# Altium PCB SMT160.PcbDoc
Units mm, origin at the board's own origin, x right, y up, seen from the top; angles counter-clockwise.
Board outline 261 x 160 mm, 2 copper layers (Top Layer, Bottom Layer); 36 components, 40 nets, 117 pads, 0 vias.
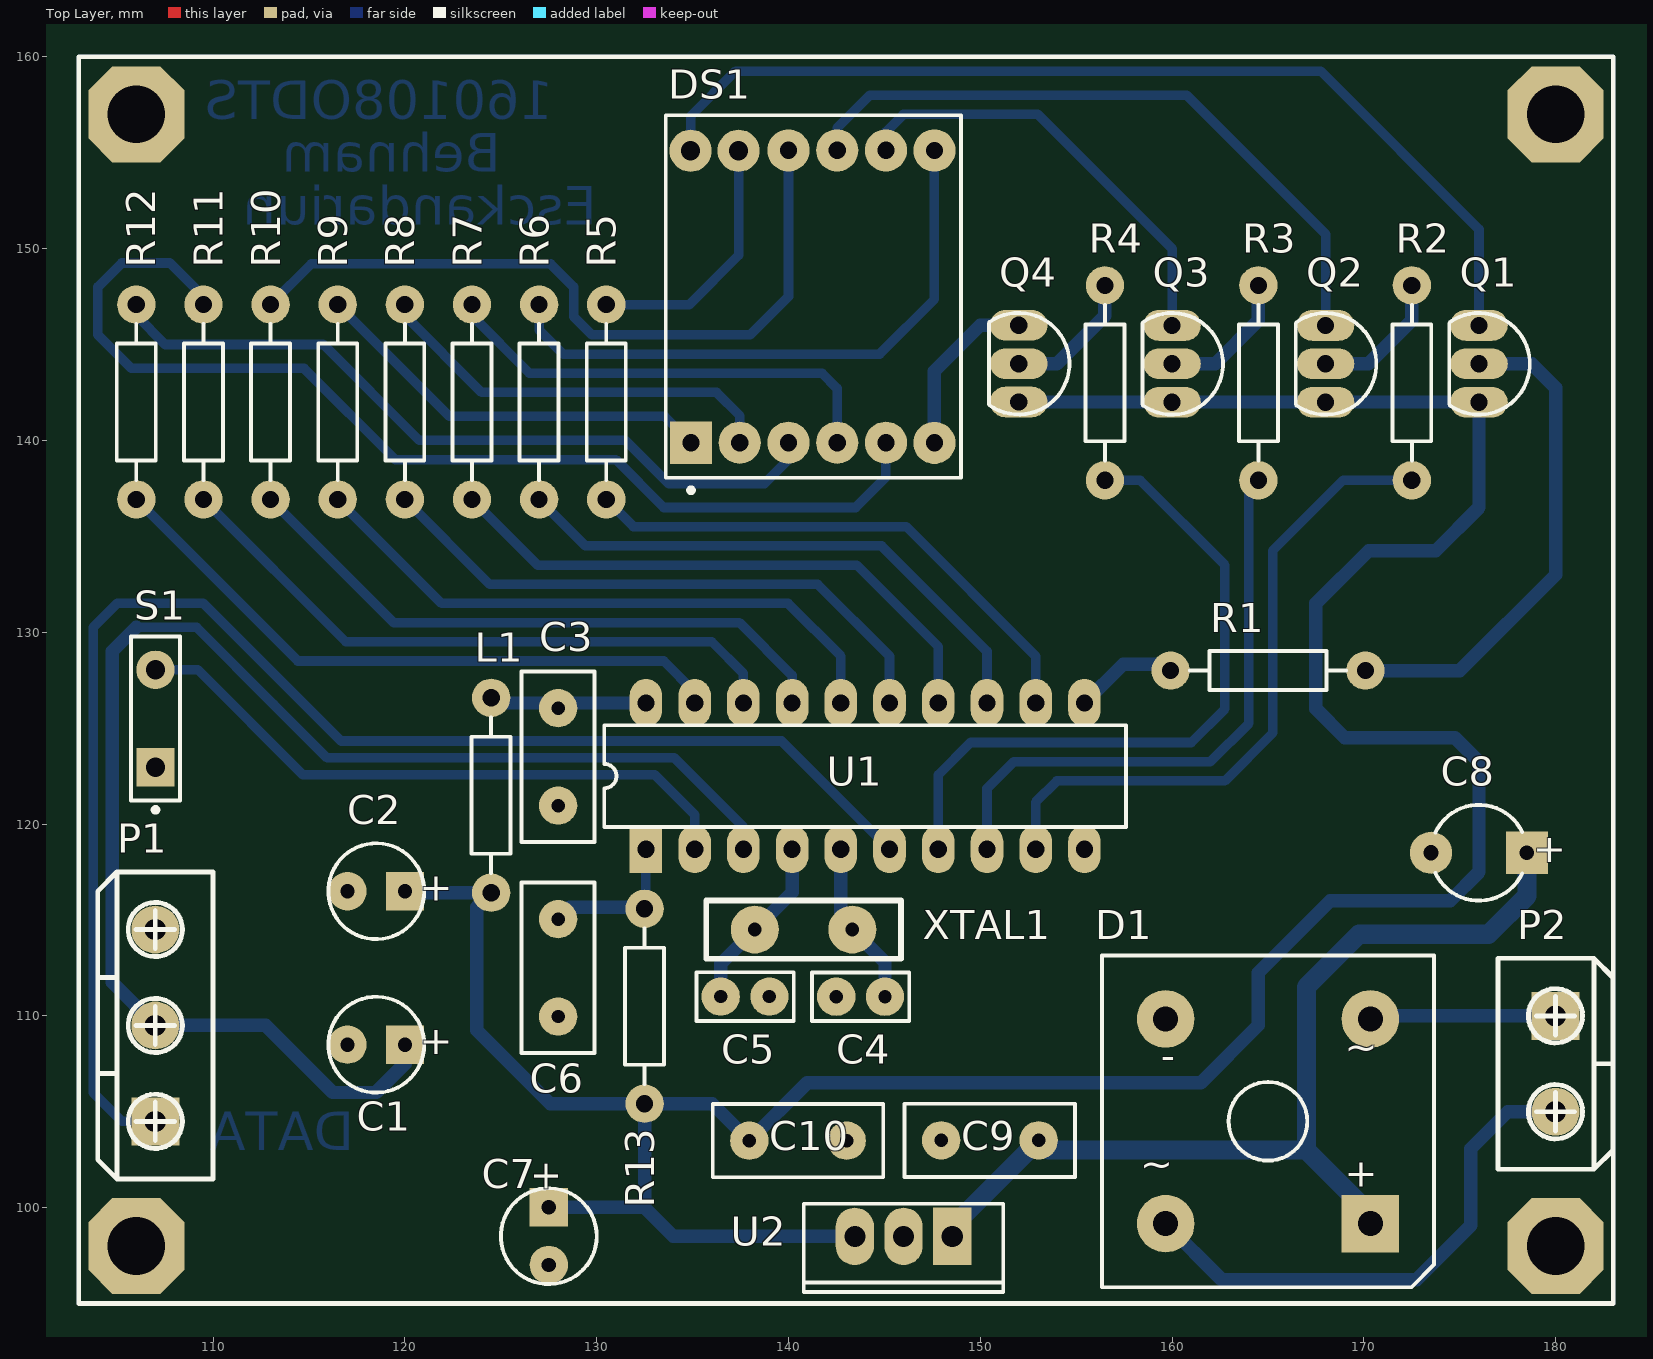
[diagram p0: Top Layer view]
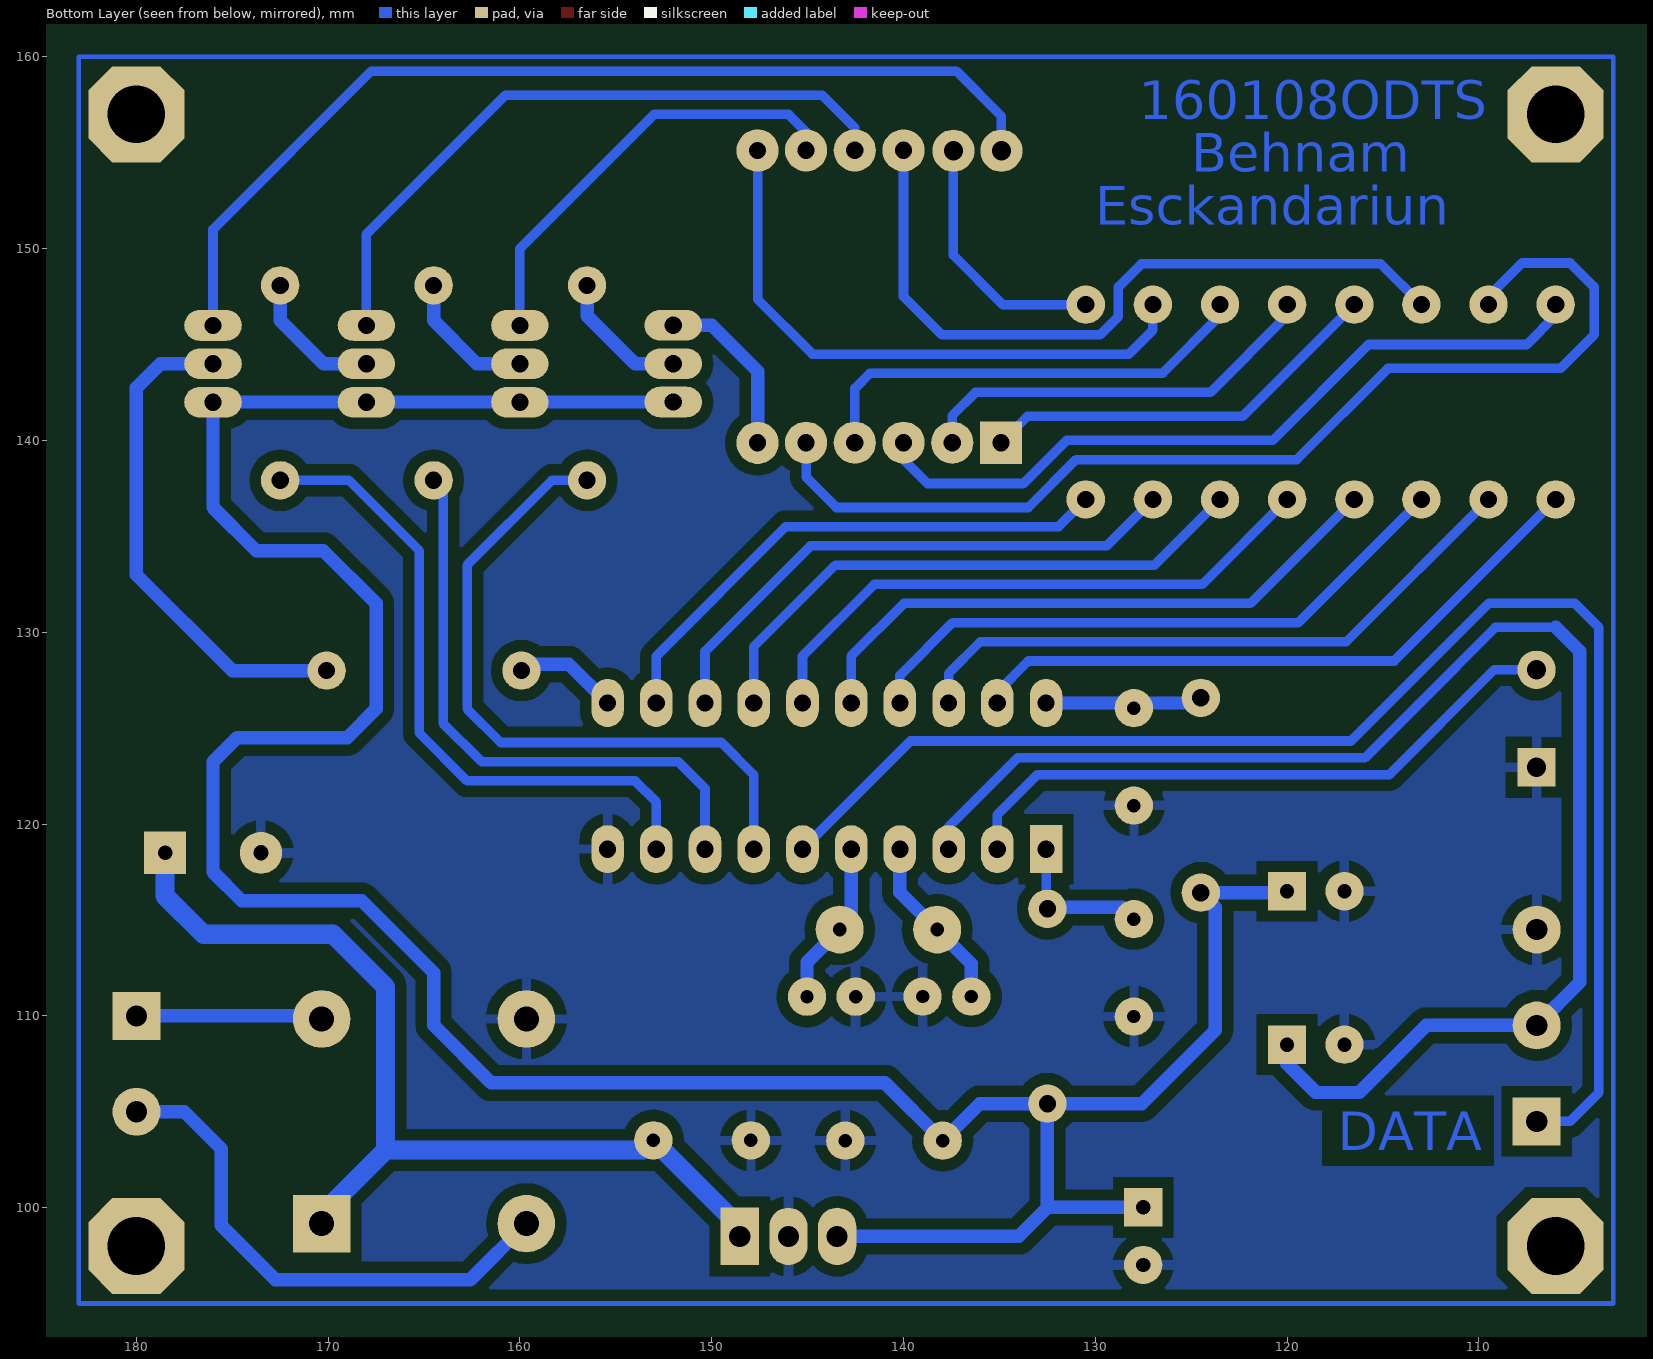
[diagram p1: Bottom Layer view, seen from below]

## Layer stack, top to bottom
Top Layer: signal copper 0.0356
Dielectric: dielectric 0.32, FR-4, Dk 4.8
Bottom Layer: signal copper 0.0356

## Board outline
24,182 285,182 285,22 24,22

## Design rules (kind name [scope] priority, off if disabled: settings)
Clearance [All] p1: gap=0.3
ComponentClearance [All] p1: gap=0.254 collisioncheckmode=3 verticalgap=0.254
HoleSize [All] p1: absolutevalues=TRUE maxlimit=3 minlimit=0.025 maxpercent=80.000 minpercent=20.000
PolygonConnect [All] p1: connectstyle=Relief reliefconductorwidth=0.5 reliefentries=4 polygonreliefangle="90 Angle"
RoutingLayers [All] p1: top layer_v5=FALSE bottom layer_v5=TRUE
RoutingVias [All] p1: holewidth=0.711 width=1.27 viastyle="Through Hole" minholewidth=0.711 minwidth=1.27 maxholewidth=0.711 maxwidth=1.27
SolderMaskExpansion [All] p1: expansion=0.102
TestPointUsage [All] p1: valid=0 allowmultiple=FALSE
Testpoint [All] p1: side=15 testpointundercomponent=TRUE minsize=1.016 maxsize=2.54 preferedsize=1.524 minholesize=0 maxholesize=1.016 preferedholesize=0.813 testpointgrid=0.025 style=1023 order=0-112345678
Width [All] p1: maxlimit=1 minlimit=0.25 preferedwidth=0.254 toplayer_minwidth=0.254 toplayer_maxwidth=0.254 bottomlayer_prefwidth=0.75 minimp=50.000000 maximp=50.000000 favimp=50.000000
16 further rules are at their usual default settings.

## Components (designator, comment, footprint, x,y, rotation, side; value= is the part's Value field where it differs from the comment)
C1 "Cap Pol1" CAPPR2-5X6.8 118.5,108.5 r180 top
C2 "Cap Pol1" CAPPR2-5X6.8 118.5,116.5 r180 top
C3 "Cap" RAD-0.2 128,123.5 r90 top
C4 "Cap" RAD-0.1 143.75,111 r0 top
C5 "Cap" RAD-0.1 137.75,111 r180 top
C6 "Cap" RAD-0.2 128,112.5 r90 top
C7 "Cap Pol1" CAPPR2-5X6.8 127.5,98.5 r270 top
C8 "Cap Pol1" CAPPR5-5X5 176,118.5 r180 top
C9 "Cap" RAD-0.2 150.5,103.5 r0 top
C10 "Cap" RAD-0.2 140.5,103.5 r180 top
D1 "Bridge2" D-46_6A 165,104.5 r180 top
DS1 "4-SEG COM-ANODE MULTIPLEX DISPLAY" LED12DIP/4D 143,146 r0 top
L1 "Inductor" axial-0.4 124.5,121.5 r90 top
P1 "From SMT160 temp sensor" Cannector-3 112,118.5 r90 top
P2 "Header 2" Cannector-2 180,101 r270 top
Q1 "BC557" BCY-W3 176,144 r180 top
Q2 "BC557" BCY-W3 168,144 r180 top
Q3 "BC557" BCY-W3 160,144 r180 top
Q4 "BC557" BCY-W3 151.999,144.008 r180 top
R1 "Res2" AXIAL-0.4 165,128 r0 top
R2 "Res2" AXIAL-0.4 172.5,143 r90 top
R3 "Res2" AXIAL-0.4 164.5,143 r90 top
R4 "Res2" AXIAL-0.4 156.5,143 r90 top
R5 "Res2" AXIAL-0.4 130.5,142 r90 top
R6 "Res2" AXIAL-0.4 127,142 r90 top
R7 "Res2" AXIAL-0.4 123.5,142 r90 top
R8 "Res2" AXIAL-0.4 120,142 r90 top
R9 "Res2" AXIAL-0.4 116.5,142 r90 top
R10 "Res2" AXIAL-0.4 113,142 r90 top
R11 "Res2" AXIAL-0.4 109.5,142 r90 top
R12 "Res2" AXIAL-0.4 106,142 r90 top
R13 "Res2" AXIAL-0.4 132.5,110.5 r270 top
S1 "MAX/MIN" SPST-2 107,125.5 r90 top
U1 "ATtiny2313-20PU" 20P3 144,122.5 r0 top
U2 "L7805CV" TO220ABN 146,98.5 r180 top
XTAL1 "8.000000MHZ" XTAL-1 138.25,114.5 r0 top

## Footprints (in the part's own frame and the unit in brackets; to place one, negate y for a bottom-side part, rotate by r counter-clockwise, add the part's x,y. Pads: shape width x height; smd on the part's side, far side on the other; paste and mask are expansions set on the pad)
20P3 [mm] "DIP; 20 Leads; Row Spacing 7.62 mm; Pitch 2.54 mm"
  rect 1.7x2.5 hole 0.9: 1(-11.43,-3.81)
  oval 1.7x2.5 hole 0.9: 2(-8.89,-3.81) 3(-6.35,-3.81) 4(-3.81,-3.81) 5(-1.27,-3.81) 6(1.27,-3.81) 7(3.81,-3.81) 8(6.35,-3.81) 9(8.89,-3.81) 10(11.43,-3.81) 11(11.43,3.81) 12(8.89,3.81) 13(6.35,3.81) 14(3.81,3.81) 15(1.27,3.81) 16(-1.27,3.81) 17(-3.81,3.81) 18(-6.35,3.81) 19(-8.89,3.81) 20(-11.43,3.81)
  silkscreen extent -13.6,-2.65 13.6,2.65
axial-0.4 [mm]
  round 2 hole 0.9: 1(-5.08,0) 2(5.08,0)
  silkscreen extent -4.06,-1.02 4.06,1.02
AXIAL-0.4 [mm] "Resistor; 2 Leads"
  round 2 hole 0.9: 1(-5.08,0) 2(5.08,0)
  silkscreen extent -4.06,-1.02 4.06,1.02
BCY-W3 [mm]
  oval 3x1.6 hole 0.9: 1(-0.001,-1.992) 2(-0.001,0.008) 3(-0.001,2.008)
  silkscreen extent -2.65,-2.64 1.55,2.66
Cannector-2 [mm] "Power connectro with screw"
  rect 2.5x2.5 hole 1.1: 1(-8.999,-0.011)
  round 2.5 hole 1.1: 2(-3.999,-0.011)
  oval 1x0.75 on Top Overlay: 3(-8.999,-2.011) 3(-3.999,-2.011)
  silkscreen extent -12,-3.01 -1,2.99
Cannector-3 [mm]
  rect 2.5x2.5 hole 1.1: 1(-14.003,5.01)
  round 2.5 hole 1.1: 2(-9.003,5.01) 3(-4.003,5.01)
  oval 1x0.75 on Top Overlay: ""(-14.003,3.01) ""(-9.003,3.01) ""(-4.003,3.01)
  silkscreen extent -17,2.01 -1,8.01
CAPPR2-5X6.8 [mm]
  rect 2x2 hole 0.75: 1(-1.511,0.005)
  round 2 hole 0.75: 2(1.489,0.005)
  silkscreen extent -2.51,-2.49 2.49,2.5
CAPPR5-5X5 [mm]
  rect 2.2x2.2 hole 0.75: 1(-2.5,0)
  round 2.2 hole 0.8: 2(2.5,0)
  silkscreen extent -2.26,-2.5 2.27,2.5
D-46_6A [mm] "Bridge Rectifier; 4 Terminals; Body 16.8 x 16.8 mm (typ); Pitch 10.67 mm"
  rect 3x3 hole 1.3: 1(-5.335,5.335)
  round 3 hole 1.3: 2(-5.335,-5.335) 3(5.335,-5.335) 4(5.335,5.335)
  silkscreen extent -8.65,-8.65 8.65,8.65
LED12DIP/4D [mm] "4Digit 7-segment Com-anode Display"
  rect 2.2x2.2 hole 0.9: 1(-8.08,-6.12)
  round 2.2 hole 0.9: 2(-5.54,-6.12) 3(-3,-6.12) 4(-0.46,-6.12) 5(2.08,-6.12) 6(4.608,-6.129) 7(4.608,9.111) 8(2.08,9.12) 9(-0.46,9.12) 10(-3,9.12)
  round 2.2 hole 1: 11(-5.6,9.1) 12(-8.1,9.1)
  silkscreen extent -9.4,-8.72 6,10.95
RAD-0.1 [mm]
  round 2 hole 0.7: 1(-1.258,-0.005) 2(1.282,-0.005)
  silkscreen extent -2.53,-1.28 2.55,1.26
RAD-0.2 [mm]
  round 2 hole 0.7: 1(-2.538,0.01) 2(2.542,0.01)
  silkscreen extent -4.44,-1.9 4.45,1.91
SPST-2 [mm] "Circuit Breaker; 2 Leads"
  rect 2x2 hole 1: 1(-2.54,0)
  round 2 hole 1: 2(2.54,0)
  silkscreen extent -4.89,-1.27 4.28,1.27
TO220ABN [mm]
  rect 2x3 hole 1.1: 1(-2.54,0)
  oval 2x3 hole 1.1: 2(2.54,0) 3(0,0)
  silkscreen extent -5.2,-1.7 5.2,2.9
XTAL-1 [mm]
  round 2.5 hole 0.711: 1(0,-0.003) 2(5.08,-0.003)
  silkscreen extent -2.54,-1.53 7.62,1.52

## Part data
C1 C2 C7 C8: "Polarized Capacitor (Radial)"
C3 C4 C5 C6 C9 C10: "Capacitor"
D1: "Diode Bridge"
DS1: library part Component_1
P1: library part "Header 3", "Header, 3-Pin"
P2: "Header, 2-Pin"
Q1 Q2 Q3 Q4: "PNP General-purpose Transistor"
R1 R2 R3 R4 R5 R6 R7 R8 R9 R10 R11 R12 R13: "Resistor"
S1: library part SW-PB, "Switch"
U1: library part AT90S2313-10PI, "8-Bit AVR Microcontroller with 2K Bytes of In-System Programmable Flash Memory"
U2: "Positive Voltage Regulator"
XTAL1: library part XTAL, "Crystal Oscillator"

## Free pads (board coordinates)
  oct 5x5 hole 3: 0(106,157) 1(106,98) 1(180,98) 1(180,157)

## Nets (pads, with @x,y where several pads share a name; then routed paths per layer and width w, separated by ;. In a path a pad name is that pad's centre, name@x,y a point inside that pad or via, vN(x,y) a via of type N, cw(c..) or ccw(c..) an arc to the next point about the centre after c; other vN are vias at no path point)
+5: C2.1 C7.1 C10.2 L1.1 Q1.3 Q2.3 Q3.3 Q4.3 R13.2 U2.2 | length 157
  Bottom Layer w0.7: C2.1 120.086,116.42 L1.1 123.75,115.67 123.75,109.25 127.58,105.42 136.028,105.42 C10.2 140.968,106.5 161.5,106.5 164.5,109.5 164.5,112.25 168.25,116 174.5,116 176,117.5 176,123.25 174.75,124.5 169,124.5 167.5,126 167.5,131.5 170.25,134.25 173.75,134.25 176,136.5 Q1.3@176,141.994 ; C7.1 132.489,100.011 ; R13.2 132.5,100.022 132.489,100.011 ; U2.2 134,98.5 132.489,100.011 ; Q4.3 175.994,142 Q1.3
A: DS1.11 R5.2 | length 13.4
  Bottom Layer w0.5: R5.2 134.83,147.08 137.4,149.65 DS1.11
A1: DS1.12 Q1.1 | length 52.3
  Bottom Layer w0.5: DS1.12 134.9,156.9 137.25,159.25 167.75,159.25 176.001,150.999 ; Q1.1 176.001,150.999
A2: DS1.9 Q2.1 | length 35.1
  Bottom Layer w0.5: DS1.9 142.54,156.29 144.25,158 160.75,158 168.001,150.749 Q2.1
A3: DS1.8 Q3.1 | length 23.2
  Bottom Layer w0.5: DS1.8 145.08,156.08 146,157 153,157 160.001,149.999 Q3.1
A4: DS1.6 Q4.1 | length 9.1
  Bottom Layer w0.7: DS1.6 147.608,143.608 150,146 Q4.1
B: DS1.7 R6.2 | length 31.4
  Bottom Layer w0.5: R6.2 127,145.75 128.25,144.5 144.75,144.5 147.608,147.358 DS1.7
B_A1: R1.1 U1.11 | length 5.4
  Bottom Layer w0.7: U1.11 157.45,128.33 R1.1@160,128.33
B_A2: R2.1 U1.9 | length 34.6
  Bottom Layer w0.5: U1.9 152.89,121.14 154,122.25 162.75,122.25 165.25,124.75 165.25,134.25 168.92,137.92 R2.1
B_A3: R3.1 U1.8 | length 31.1
  Bottom Layer w0.5: U1.8 150.35,121.85 151.75,123.25 162,123.25 164,125.25 164,137.42 R3.1
B_A4: R4.1 U1.7 | length 35.8
  Bottom Layer w0.5: U1.7 147.81,122.56 149.5,124.25 161,124.25 162.75,126 162.75,133.5 158.33,137.92 R4.1
C: DS1.4 R7.2 | length 24
  Bottom Layer w0.5: R7.2 123.5,146.5 126.5,143.5 141.75,143.5 142.54,142.71 DS1.4
D: DS1.2 R8.2 | length 21.6
  Bottom Layer w0.5: R8.2 120,146.5 124,142.5 136.25,142.5 137.46,141.29 DS1.2
DP: DS1.3 R12.2 | length 39.6
  Bottom Layer w0.5: R12.2 106,146.5 107.5,145 115.75,145 120.75,140 131.5,140 133.75,137.75 138.75,137.75 140,139 DS1.3
E: DS1.1 R9.2 | length 21.4
  Bottom Layer w0.5: R9.2 122.33,141.25 133.55,141.25 DS1.1
F: DS1.10 R10.2 | length 38.8
  Bottom Layer w0.5: R10.2 115.12,149.2 127.6,149.2 128.8,148 128.8,146.45 129.75,145.5 138,145.5 140,147.5 DS1.10
G: DS1.5 R11.2 | length 56.9
  Bottom Layer w0.5: R11.2 109.5,147.5 107.75,149.25 105.25,149.25 104,148 104,145.5 105.75,143.75 114.75,143.75 119.5,139 131,139 133.5,136.5 143.5,136.5 145.08,138.08 DS1.5
GND: C1.2 C2.2 C3.1 C4.1 C5.1 C6.1 C7.2 C8.2 C9.1 C10.1 D1.3 P1.3 S1.1 U1.10 U2.3
NetC1_1: C1.1 P1.2 U1.3 | length 75.4
  Bottom Layer w0.5: 106,130.25 109.15,130.25 113.162,126.238 115.95,123.45 134.05,123.45 137.65,119.85 U1.3
  Bottom Layer w0.7: 106,130.25 104.75,129 104.75,111.75 P1.2@107.003,109.497 ; P1.2 112.753,109.497 116.25,106 118.5,106 120.011,107.511 C1.1
NetC3_2: C3.2 L1.2 U1.20 | length 8.2
  Bottom Layer w0.7: L1.2 124.77,126.31 U1.20
NetC4_2: C4.2 U1.5 XTAL1.2 | length 8.6
  Bottom Layer w0.7: U1.5 142.73,115.097 XTAL1.2 145.032,112.795 C4.2
NetC5_2: C5.2 U1.4 XTAL1.1 | length 9.2
  Bottom Layer w0.7: C5.2 136.468,112.715 140.19,116.436 U1.4
NetC6_2: C6.2 R13.1 U1.1 | length 11.8
  Bottom Layer w0.5: C6.2 128.598,115.65 132.57,115.65 U1.1
  Bottom Layer w0.7: C6.2@128.598,115.65 R13.1@132.57,115.65
NetC8_1: C8.1 C9.2 D1.1 U2.1 | length 50.5
  Bottom Layer w1: U2.1 148.54,99.008 C9.2 153.552,103 167,103 ; D1.1 170.335,99.665 167,103 ; C8.1 178.5,116.25 176.5,114.25 169.75,114.25 167,111.5 167,103
NetD1_2: D1.2 P2.1 | length 9.7
  Bottom Layer w0.7: D1.2 170.499,109.999 P2.1
NetD1_4: D1.4 P2.2 | length 27.5
  Bottom Layer w0.7: D1.4 162.58,96.25 172.75,96.25 175.569,99.069 175.569,103.069 177.499,104.999 P2.2
NetP1_1: P1.1 U1.6 | length 75.5
  Bottom Layer w0.5: P1.1 105.253,104.497 103.75,106 103.75,130.25 105,131.5 109.5,131.5 116.675,124.325 139.635,124.325 U1.6
NetQ1_2: Q1.2 R1.2 | length 26.2
  Bottom Layer w0.7: R1.2 175,128 180,133 180,142.734 178.742,143.992 Q1.2
NetQ2_2: Q2.2 R2.2 | length 7.3
  Bottom Layer w0.7: Q2.2 170.242,143.992 172.5,146.25 R2.2
NetQ3_2: Q3.2 R3.2 | length 7.3
  Bottom Layer w0.7: Q3.2 162.242,143.992 164.5,146.25 R3.2
NetQ4_2: Q4.2 R4.2 | length 7.1
  Bottom Layer w0.7: Q4.2 154,144 156.5,146.5 R4.2
NetR5_1: R5.1 U1.12 | length 28.2
  Bottom Layer w0.5: R5.1 131.92,135.5 146.14,135.5 152.89,128.75 U1.12
NetR6_1: R6.1 U1.13 | length 29.3
  Bottom Layer w0.5: R6.1 129.42,134.5 144.85,134.5 150.35,129 U1.13
NetR7_1: R7.1 U1.14 | length 30.4
  Bottom Layer w0.5: R7.1 126.92,133.5 143.56,133.5 147.81,129.25 U1.14
NetR8_1: R8.1 U1.15 | length 31.1
  Bottom Layer w0.5: R8.1 124.42,132.5 141.52,132.5 145.27,128.75 U1.15
NetR9_1: R9.1 U1.16 | length 32.1
  Bottom Layer w0.5: R9.1 121.92,131.5 139.98,131.5 142.73,128.75 U1.16
NetR10_1: R10.1 U1.17 | length 32.4
  Bottom Layer w0.5: R10.1 119.42,130.5 137.44,130.5 140.19,127.75 U1.17
NetR11_1: R11.1 U1.18 | length 33.4
  Bottom Layer w0.5: R11.1 116.92,129.5 136,129.5 137.65,127.85 U1.18
NetR12_1: R12.1 U1.19 | length 33.8
  Bottom Layer w0.5: R12.1 114.42,128.5 133.5,128.5 135.11,126.89 U1.19
NetS1_2: S1.2 U1.2 | length 33
  Bottom Layer w0.5: S1.2 109.21,128.04 114.675,122.575 133.025,122.575 135.11,120.49 U1.2
pads on no net: P1. P2.3
copper on no net: | length 290
  Bottom Layer w0.254: 103,95 183,95 183,160 103,160 103,95

## Polygon pours and split planes (outlines as drawn)
GND on Bottom Layer "Bottom Layer-GND" (solid, remove dead copper, pour order 1000): 182.925,159.997 182.925,94.997 102.925,94.997 102.925,159.997

## Other copper
Bottom Layer:
  text "160108ODTS" at 127.75,156.75 h2
  text "Behnam" at 125,154 h2
  text "Esckandariun" at 130,151.25 h2
  text "DATA" at 117.35,103 h2

## Silkscreen, mask and mechanical layers (free items; w line width, h text height)
Top Overlay:
  lines w0.254: 103,95 183,95 183,160 103,160 103,95

## Text inside footprints (layer, text, board x,y; h text height)
C1: Top Overlay "+" at 122.486,109.245 h1.5 r180
C2: Top Overlay "+" at 122.486,117.245 h1.5 r180
C7: Top Overlay "+" at 126.755,102.486 h1.5 r270
C8: Top Overlay "+" at 180.55,119.25 h1.5 r180
D1: Top Overlay "+" at 170.723,102.333 h1.5 r180; Top Overlay "-" at 160.175,108.309 h1.5 r180; Top Overlay "~" at 160.055,102.841 h1.5 r180; Top Overlay "~" at 170.723,108.937 h1.5 r180